# Altium PCB EMG_Sensors_Temp.PcbDoc
Units mm, origin at the board's own origin, x right, y up, seen from the top; angles counter-clockwise.
Board outline 21.75 x 12 mm, 2 copper layers (Top Layer, Bottom Layer), stack 0.97 mm thick; 4 components, 5 nets, 23 pads, 5 vias.
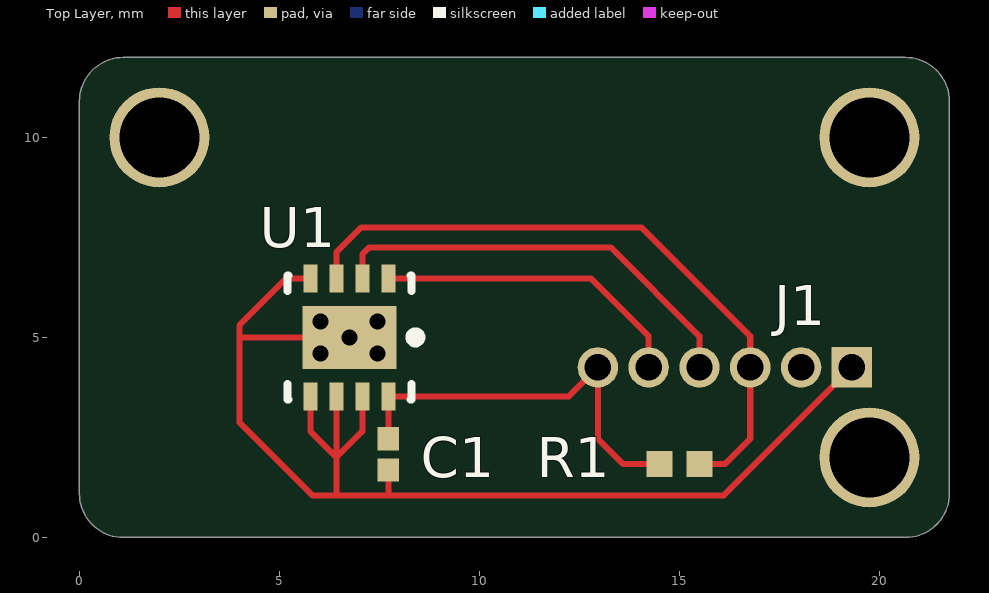
[diagram p0: Top Layer view]
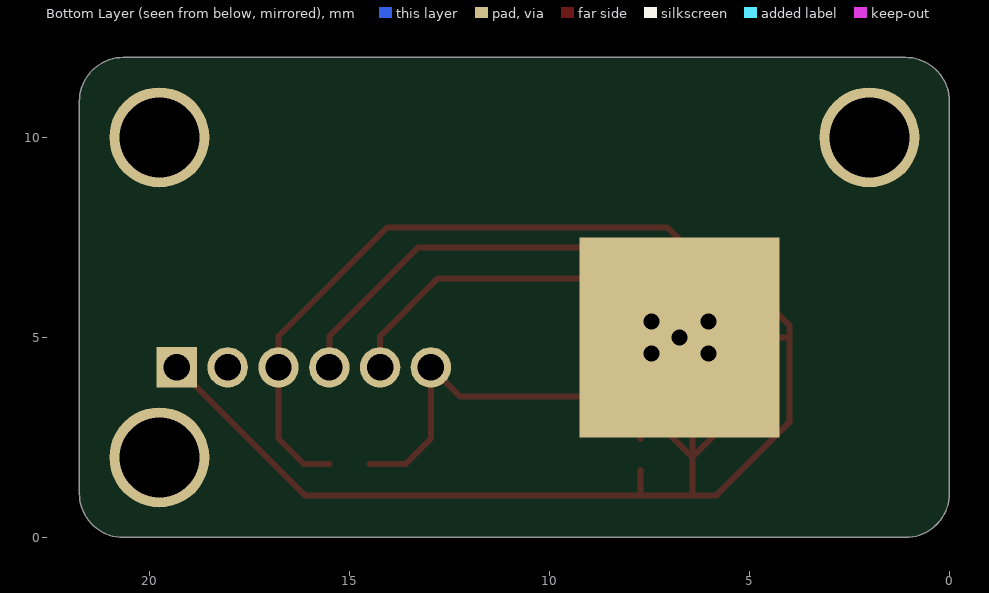
[diagram p1: Bottom Layer view, seen from below]

## Layer stack, top to bottom
Top Solder: solder mask 0.01, Solder Resist, Dk 3.3
Top Layer: signal copper 0.035
Dielectric1: core 0.9, FR-4, Dk 4.3
Bottom Layer: signal copper 0.035
Bottom Solder: solder mask 0.01, Solder Resist, Dk 3.3

## Board outline
0,1.1 0,10.9 cw(c1.1,10.9) 1.1,12 20.65,12 cw(c20.65,10.9) 21.75,10.9 21.75,1.099 cw(c20.65,1.099) 20.65,-0.001 20.65,0.003 1.1,-0.002 cw(c1.1,1.098)

## Design rules (kind name [scope] priority, off if disabled: settings)
BoardOutlineClearance [All] p1: gap=0.2 ignorepadtopadclearanceinfootprint=FALSE
Clearance [All] p1: gap=0.127 ignorepadtopadclearanceinfootprint=FALSE except(0.2: Arc-SMDPad Arc-THPad Track-SMDPad Track-THPad; 0.25: SMDPad-Hole THPad-Hole Via-Hole Fill-Hole Poly-Hole Region-Hole Text-Hole; 0.254: Arc-Via Track-Via; 0.33: Arc-Hole Track-Hole)
ComponentClearance [All] p1: gap=0.127 collisioncheckmode=3 verticalgap=0.127 showdistances=TRUE
DiffPairsRouting [All] p1: maxlimit=0.254 minlimit=0.127 mostfreqgap=0.127 toplayer_minwidth=0.127 toplayer_maxwidth=25.4 toplayer_prefwidth=0.127 bottomlayer_minwidth=0.127 bottomlayer_maxwidth=25.4 bottomlayer_prefwidth=0.127 maxuncoupledlength=12.7
Height [All] p1: minheight=0 maxheight=1816.048 prefheight=12.7
HoleSize [All] p1: absolutevalues=TRUE maxlimit=6.3 minlimit=0.3 maxpercent=80.000 minpercent=20.000
HoleToHoleClearance [All] p1: gap=0.25 allowstackedmicrovias=FALSE
MinimumAnnularRing [All] p1: minimumring=0.076
MinimumSolderMaskSliver [All] p1: minsoldermaskwidth=0
PlaneClearance [All] p1: clearance=0.127
PlaneConnect PlaneConnectPowerPads [InPadClass('PowerPads')] p1: planeconnectstyle=Direct reliefexpansion=0.508 reliefentries=4 reliefconductorwidth=0.254 reliefairgap=0.254
PlaneConnect [All] p2: pad.planeconnectstyle=Relief pad.reliefexpansion=0.3 pad.reliefentries=4 pad.reliefconductorwidth=0.127 pad.reliefairgap=0.127 via.planeconnectstyle=Direct via.reliefexpansion=0.3 via.reliefentries=4 via.reliefconductorwidth=0.127 via.reliefairgap=0.127
PolygonConnect PolygonConnectPowerPads [All vs (InPadClass('PowerPads'))] p1: connectstyle=Direct reliefconductorwidth=0.254 reliefentries=4 polygonreliefangle="90 Angle" airgapwidth=0.254
PolygonConnect [All] p2: thpad.connectstyle=Relief thpad.reliefconductorwidth=0.254 thpad.reliefentries=4 thpad.polygonreliefangle="90 Angle" thpad.airgapwidth=0.127 smdpad.connectstyle=Relief smdpad.reliefconductorwidth=0.254 smdpad.reliefentries=4 smdpad.polygonreliefangle="90 Angle" smdpad.airgapwidth=0.127 via.connectstyle=Direct via.reliefconductorwidth=0.127 via.reliefentries=4 via.polygonreliefangle="90 Angle" via.airgapwidth=0.127
RoutingVias [All] p1: holewidth=0.3 width=0.5 viastyle="Through Hole" minholewidth=0.3 minwidth=0.5 maxholewidth=1.5 maxwidth=6.6
SilkToSilkClearance [All] p1: silktosilkclearance=0
SilkToSolderMaskClearance [IsPad] p1: minsilkscreentomaskgap=0.127 clearancetoexposedcopper=TRUE
SolderMaskExpansion [All] p1: expansion=0.075 istentingtop=FALSE
Width [All] p1: maxlimit=0.508 minlimit=0.152 preferedwidth=0.254 minimp=50.000000 maximp=50.000000 favimp=50.000000
20 further rules are at their usual default settings.

## Components (designator, comment, footprint, x,y, rotation, side; value= is the part's Value field where it differs from the comment)
C1 "Capacitor 0.1 uF +/- 5% 16 V 0402" CAPC1005X56X25LL10T15 7.725,2.075 r90 top value=100nF
J1 "TMS-106-02-G-S-RA" SAMTEC_TMS-106-02-G-S-RA 16.137,4.25 r180 top
R1 "Resistor 4k7 +/-1% 0402 63 mW" RESC1005X40X25ML05T05 15,1.833 r0 top value=4.7k
U1 "MAX30205MTA+" FP-T833-2-MFG 6.75,5 r270 top

## Footprints (in the part's own frame and the unit in brackets; to place one, negate y for a bottom-side part, rotate by r counter-clockwise, add the part's x,y. Pads: shape width x height; smd on the part's side, far side on the other; paste and mask are expansions set on the pad)
CAPC1005X56X25LL10T15 [mm] "Chip Capacitor, 2-Leads, Body 1.10x0.60mm, IPC High Density"
  rect 0.58x0.54 smd: 1(-0.39,0) 2(0.39,0)
  body extent -0.55,-0.3 0.55,0.3, height 0.56
FP-T833-2-MFG [mm]
  rect 0.7x0.35 smd paste+0 mask+0: 1(-1.475,0.975) 2(-1.475,0.325) 3(-1.475,-0.325) 4(-1.475,-0.975) 5(1.475,-0.975) 6(1.475,-0.325) 7(1.475,0.325) 8(1.475,0.975)
  rect 1.58x2.35 smd paste+0 mask+0: 9(0,0)
  silkscreen extent -1.55,-1.55 1.55,1.78
RESC1005X40X25ML05T05 [mm] "Chip Resistor, 2-Leads, Body 1.05x0.55mm, IPC Low Density"
  rect 0.65x0.65 smd: 1(-0.5,0) 2(0.5,0)
  body extent -0.53,-0.28 0.53,0.28, height 0.4
SAMTEC_TMS-106-02-G-S-RA [mm]
  rect 1.01x1.01 hole 0.66: 01(-3.175,0)
  round 1.01 hole 0.66: 02(-1.905,0) 03(-0.635,0) 04(0.635,0) 05(1.905,0) 06(3.175,0)

## Part data
C1: library part CMP-001-00001-6, "Chip Capacitor, 0.1 uF, +/- 5%, 16 V, 0402 (1005 Metric)", Capacitor Type=Ceramic, Case/Package=0402, Max Operating Temperature=125°C, Min Operating Temperature=-55°C, Tolerance=5%, Voltage Rating=16V, Mounting Technology=SM, Pins=2, RoHS Compliant=True
J1: Package=None, Availability=Unavailable, MP=TMS-106-02-G-S-RA, Price=None
R1: library part CMP-009-00034-5, "Chip Resistor, 4.7 KOhm, +/- 1%, 63 mW, -55 to 155 degC, 0402 (1005 Metric)", Case/Package=0402, Max Operating Temperature=155°C, Min Operating Temperature=-55°C, Power=63mW, Tolerance=1%, Voltage Rating=50V, Mounting Technology=SM, Pins=2, RoHS Compliant=True
U1: library part CMP-05752-000001-1, "SENSOR DIGITAL 0C-50C 8TDFN", Manufacturer="Maxim Integrated", Max Junction Temp=+50°C, Max Supply Voltage=3.3V, Min Supply Voltage=2.7V, Operating Supply Current=600uA, Package=T833-2, Temperature="0°C to +50°C", Temperature Range Low=0°C, Automotive=No, Category=IC, ComponentLink2Description=Datasheet, ComponentLink2URL=https://datasheets.maximintegrated.com/en/ds/MAX30205.pdf, Device Class L1=Sensors, Device Class L2="Temperature and Humidity Sensors", Device Class L3=unset, Digikey Description="SENSOR DIGITAL 0C-50C 8TDFN", Footprint Url=https://pdfserv.maximintegrated.com/land_patterns/90-0059.PDF, Height=0.8mm, Interface=I2C,2-Wire,SMBus, Ipc Land Pattern Name=DFN300X300X75-8, Lead Free=Yes, Manufacturer Part Number=MAX30205MTA+, Octopart=https://octopart.com/max30205mta%2B-maxim+integrated-66461181, Resolution=16bits, RoHS=TRUE, Sensor Output=I2C, Standoff Height=0mm, Temperature Range High=+50°C

## Free pads (board coordinates)
  round 2.5 hole 2: 1(19.75,2) 2(2,10) 3(19.75,10)
  rect 5x5 smd far side: 5(6.75,5)

## Via types
v1: diameter 0.6, hole 0.4, Top Layer to Bottom Layer, 5 vias

## Nets (pads, with @x,y where several pads share a name; then routed paths per layer and width w, separated by ;. In a path a pad name is that pad's centre, name@x,y a point inside that pad or via, vN(x,y) a via of type N, cw(c..) or ccw(c..) an arc to the next point about the centre after c; other vN are vias at no path point)
+3.3VDC: C1.2 J1.06 R1.1 U1.8 | length 10.2
  Top Layer w0.152: C1.2 U1.8 12.237,3.525 J1.06 12.962,2.471 13.6,1.833 R1.1
GND: C1.1 J1.01 pad.5 U1.4 U1.5 U1.6 U1.7 U1.9 | length 31.5
  Top Layer w0.152: U1.5 5.775,2.65 6.425,2 ; U1.4 5.175,6.475 4,5.3 4,5 ; U1.6 6.425,2 ; v1(6.75,5) 4,5 ; U1.7 7.075,2.65 6.425,2 ; C1.1 7.725,1.05 ; J1.01 16.112,1.05 7.725,1.05 ; 4,5 4,2.875 5.825,1.05 6.425,1.05 ; 6.425,1.05 7.725,1.05 ; 6.425,1.05 6.425,2
  other v1: 6.025,4.6 7.45,4.6 6.025,5.4 7.45,5.4
OS: J1.03 R1.2 U1.3 | length 16.5
  Top Layer w0.152: U1.3 6.425,7.125 7.05,7.75 14.05,7.75 16.772,5.028 J1.03 16.772,2.471 16.134,1.833 R1.2
SCL: J1.04 U1.2 | length 10.8
  Top Layer w0.152: U1.2 7.075,7.075 7.25,7.25 13.28,7.25 15.502,5.028 J1.04
SDA: J1.05 U1.1 | length 7.9
  Top Layer w0.152: U1.1 12.785,6.475 14.232,5.028 J1.05
pads on no net: J1.02

## Silkscreen, mask and mechanical layers (free items; w line width, h text height)
Board:
  lines w0.254: 0,1.098 ccw(c1.1,1.098) 1.1,-0.002 20.65,0.003 ; 0,1.1 0,10.902 ; 0,10.9 cw(c1.1,10.9) 1.1,12 20.65,12 cw(c20.65,10.9) 21.75,10.9 21.75,1.1 cw(c20.65,1.099) 20.65,-0.001